# Altium PCB ltftemplate.PcbDoc
Units mm, origin at the board's own origin, x right, y up, seen from the top; angles counter-clockwise.
Board outline 67 x 53 mm, 2 copper layers (Top Layer, Bottom Layer); 33 components, 26 nets, 145 pads, 12 vias.
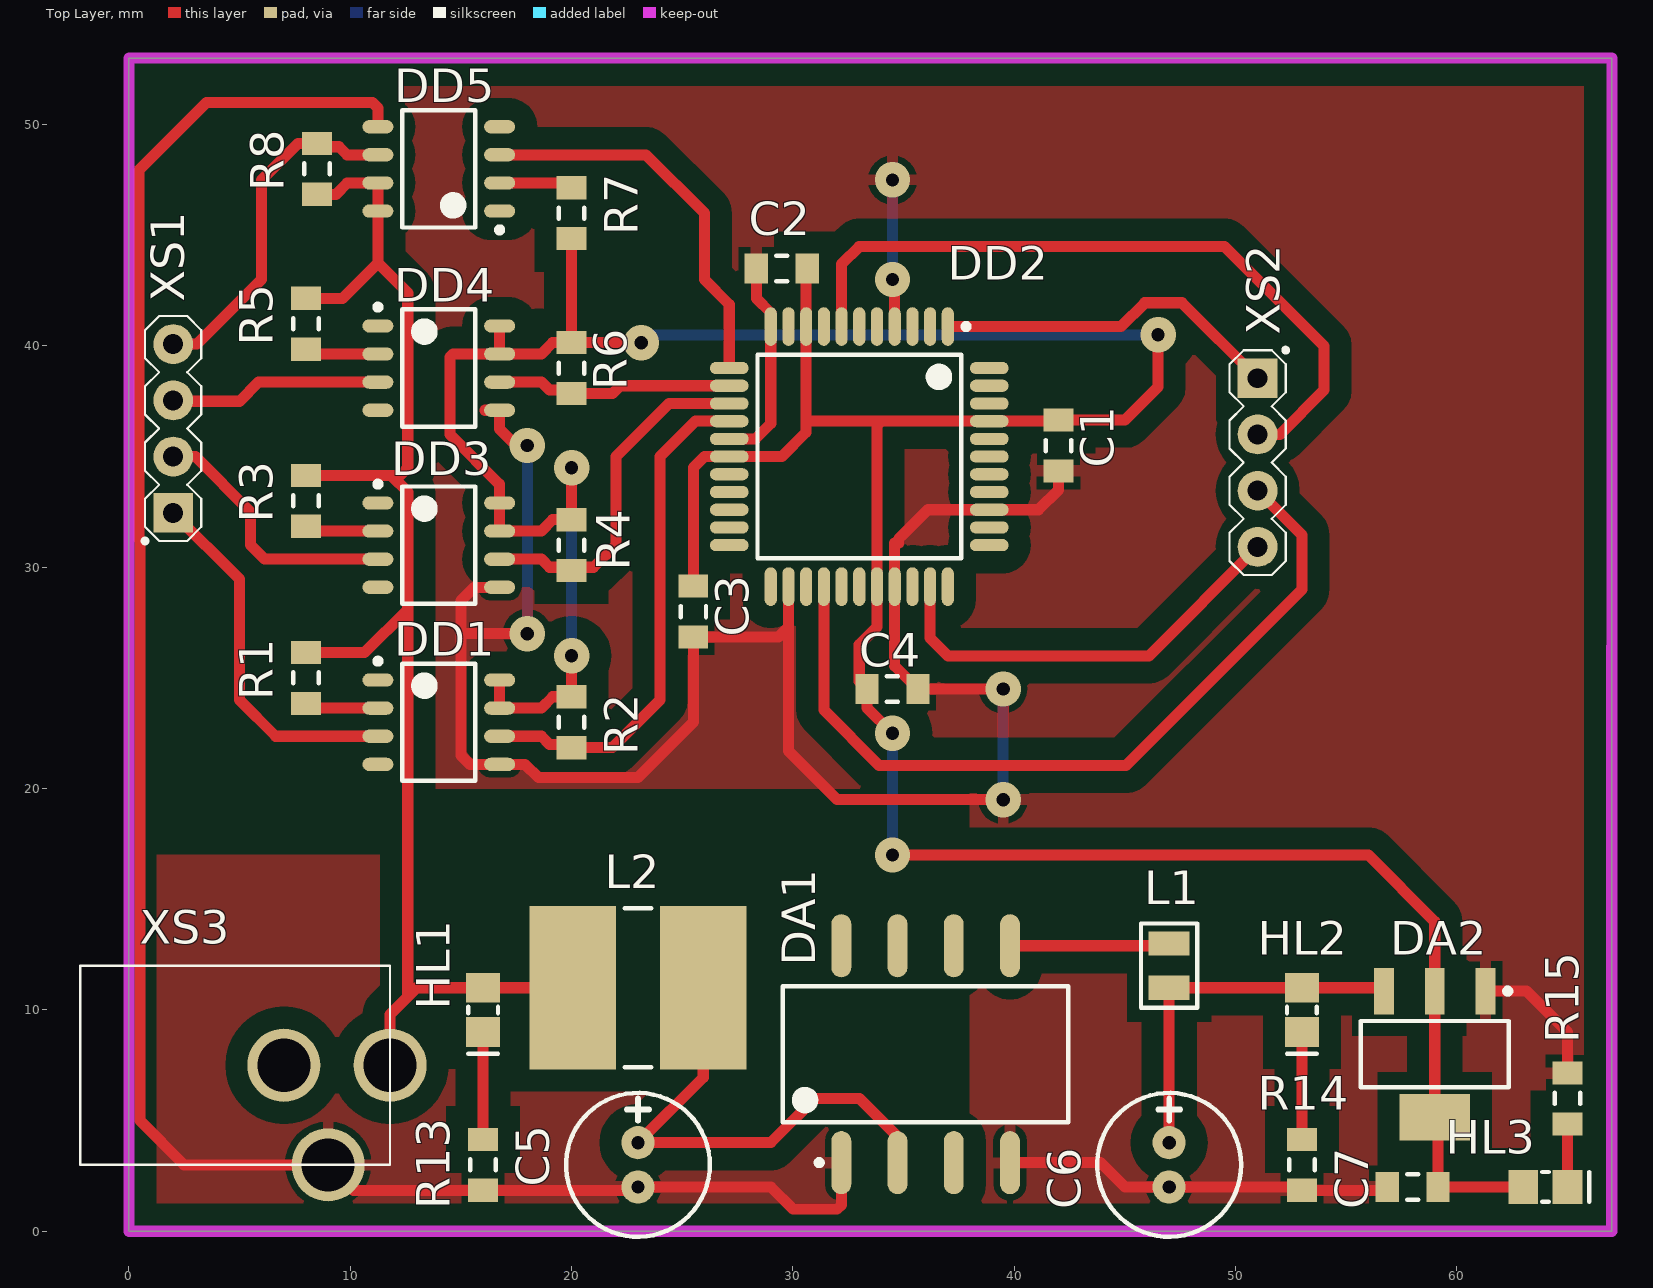
[diagram p0: Top Layer view]
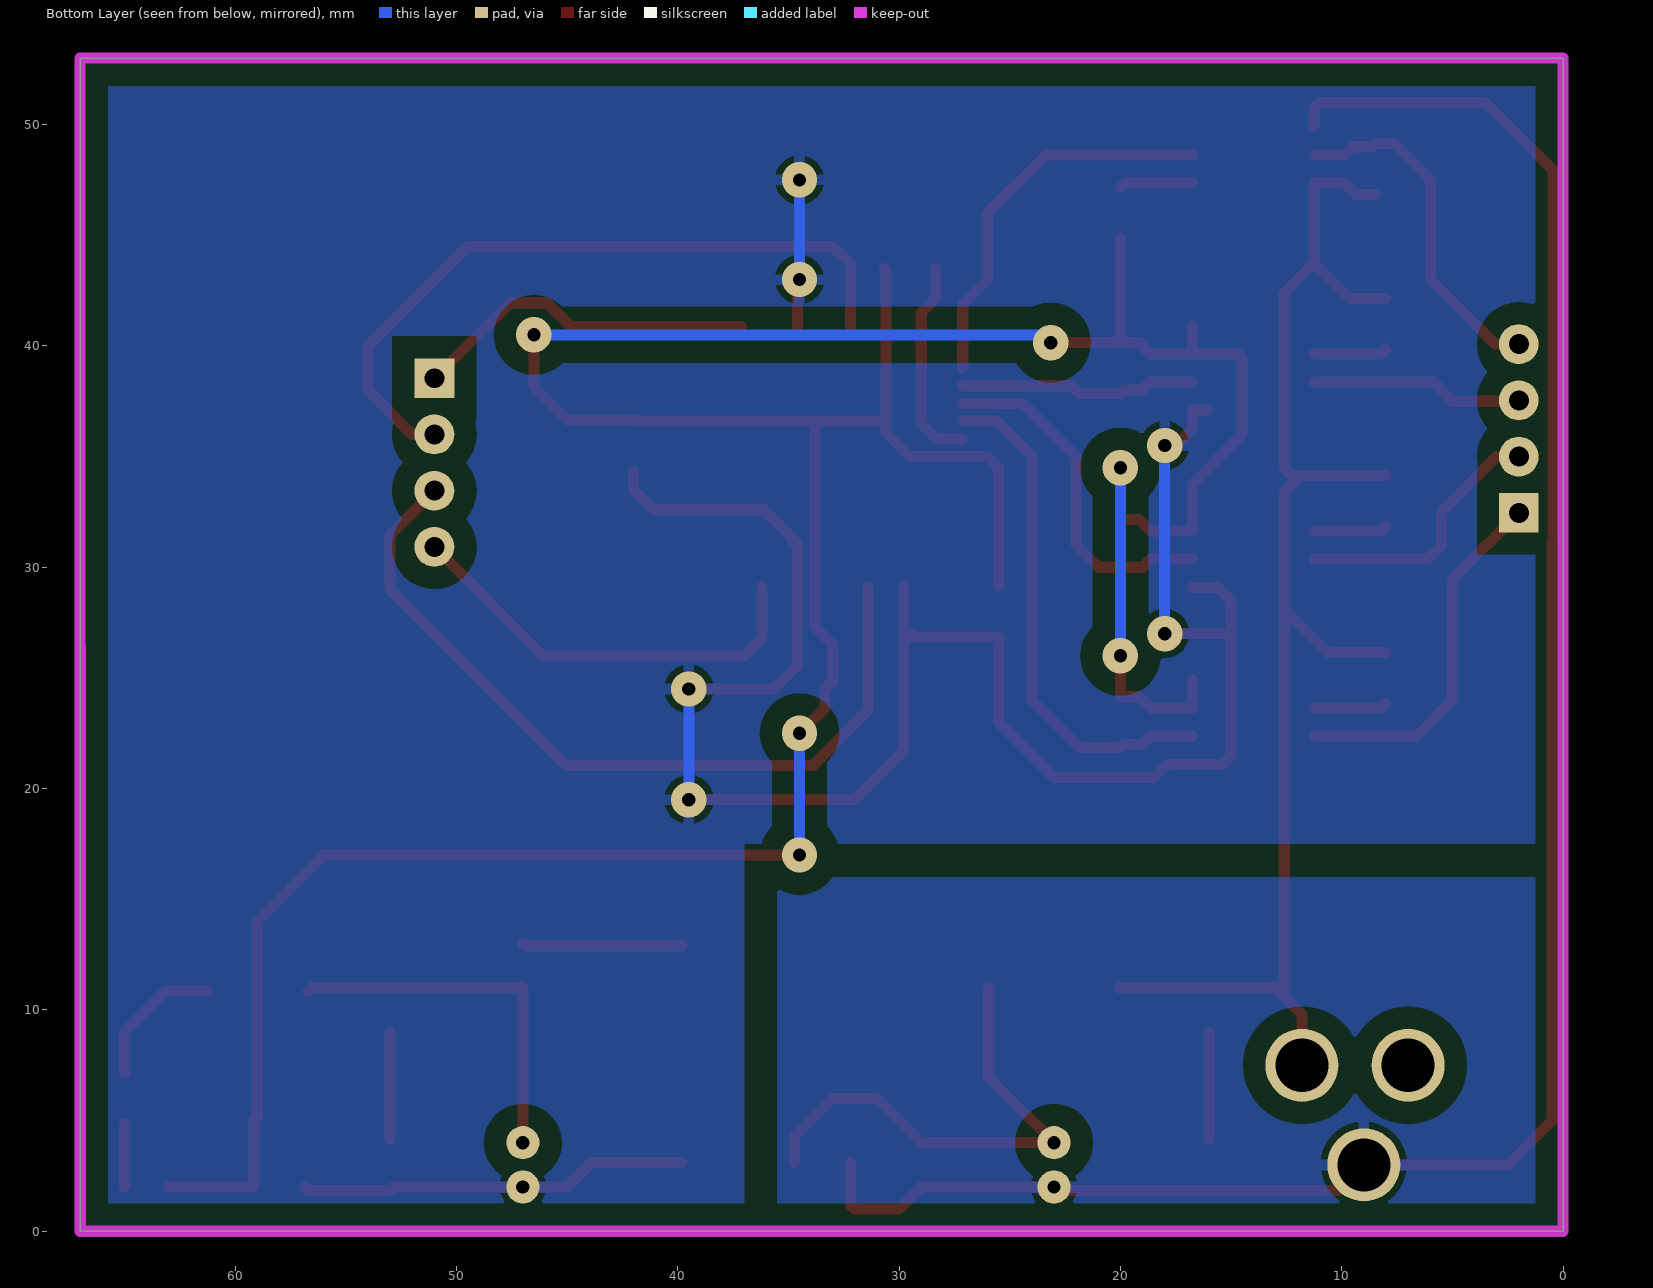
[diagram p1: Bottom Layer view, seen from below]

## Layer stack, top to bottom
Top Solder: solder mask 0.0102, Solder Resist, Dk 3.5
Top Layer: signal copper 0.0356
Dielectric 1: dielectric 0.32, FR-4, Dk 4.8
Bottom Layer: signal copper 0.0356
Bottom Solder: solder mask 0.0102, Solder Resist, Dk 3.5

## Board outline
0,0 67,0 67,53 0,53

## Design rules (kind name [scope] priority, off if disabled: settings)
AcuteAngle [All] p1: minimum=6.00000000000000E+0001 checktracksonly=FALSE
Clearance Clearance_cpld [IsRoom] p1: gap=0.2 ignorepadtopadclearanceinfootprint=TRUE
Clearance Clearance_poly [InPolygon] p2: gap=1 ignorepadtopadclearanceinfootprint=FALSE except(0: Arc-Hole Track-Hole SMDPad-Hole THPad-Hole Via-Hole Fill-Hole Poly-Hole Region-Hole Text-Hole)
Clearance Clearance_wire [IsWire vs IsWire] p3: gap=0.5 ignorepadtopadclearanceinfootprint=FALSE except(0: Arc-Hole Track-Hole SMDPad-Hole THPad-Hole Via-Hole Fill-Hole Poly-Hole Region-Hole Text-Hole)
Clearance [All] p4: gap=0.4 ignorepadtopadclearanceinfootprint=FALSE except(0: Arc-Hole Track-Hole SMDPad-Hole THPad-Hole Via-Hole Fill-Hole Poly-Hole Region-Hole Text-Hole)
ComponentClearance [All] p1: gap=0.1 collisioncheckmode=3 verticalgap=0.1 showdistances=FALSE
HoleSize [All] p1: absolutevalues=TRUE maxlimit=2.5 minlimit=0.3 maxpercent=80.000 minpercent=20.000
MaximumViaCount [All] p1: limit=20
MinimumAnnularRing [All] p1: minimumring=0.4
MinimumSolderMaskSliver [All] p1 off: minsoldermaskwidth=0.254
PasteMaskExpansion [All] p1: expansion=0.05
PlaneClearance [All] p1: clearance=0.5
PlaneConnect [All] p1: planeconnectstyle=Relief reliefexpansion=0.3 reliefentries=4 reliefconductorwidth=0.5 reliefairgap=0.3
PolygonConnect [All] p1: connectstyle=Relief reliefconductorwidth=0.5 reliefentries=4 polygonreliefangle="90 Angle" airgapwidth=0.3
RoomDefinition main [InComponentClass('main')] p1: confinementstyle=ConfineIn formatcopy=TRUE lockcomponents=FALSE outline 0,0 67,0 67,53 0,53
RoomDefinition CPLD [InComponentClass('Components Class 1')] p2: confinementstyle=ConfineIn formatcopy=TRUE lockcomponents=FALSE outline 25,42.5 40.5,42.5 40.5,27 25,27
RoutingVias [All] p1: holewidth=0.6 width=1.6 viastyle="Through Hole" minholewidth=0.6 minwidth=1.6 maxholewidth=0.6 maxwidth=1.6
SilkToBoardRegionClearance [All] p1 off:
SilkToSilkClearance [All] p1 off: silktosilkclearance=0.254
SilkToSolderMaskClearance [IsPad] p1 off: minsilkscreentomaskgap=0.254 clearancetoexposedcopper=TRUE
SolderMaskExpansion [All] p1: expansion=0.1
ViasUnderSMD [All] p1: allowed=TRUE
Width [All] p1: maxlimit=1.5 minlimit=0.4 preferedwidth=0.5
21 further rules are at their usual default settings.

## Classes and differential pairs
component class "Components Class 1": DD2

## Components (designator, comment, footprint, x,y, rotation, side; value= is the part's Value field where it differs from the comment)
C1 "100n" SMDRC0805 42,35.5 r90 top
C2 "100n" SMDRC0805 29.5,43.5 r0 top
C3 "100n" SMDRC0805 25.5,28 r90 top
C4 "100n" SMDRC0805 34.5,24.5 r0 top
C5 "5 мк 6,3 В" К50-6 23,3 r90 top
C6 "10 мк 6,3 В" К50-6 47,3 r90 top
C7 "100n" SMDRC0805 58,2 r0 top
DA1 "AM1L-1205S-NZ" SOP254P1120X625-8M 36,8 r90 top
DA2 "LD1117A" SOT230P700X180-4L 59,8 r270 top
DD1 "HCPL-0601" HCPL-1601 14,23 r0 top
DD2 "EPM3064ATC44-10N" TQFP80P1200X1230X120-44N 33,35 r270 top
DD3 "HCPL-0601" HCPL-1601 14,31 r0 top
DD4 "HCPL-0601" HCPL-1601 14,39 r0 top
DD5 "HCPL-0601" HCPL-1601 14,48 r180 top
HL1 "KP-2012SGC" DIOMELF2012M 16,10 r270 top
HL2 "KP-2012SGC" DIOMELF2012M 53,10 r270 top
HL3 "KP-2012SGC" DIOMELF2012M 64,2 r0 top
L1 "10 мкГн" MLZ2012 47,12 r270 top
L2 "330 мкГн" INDP7972X50M 23,11 r180 top
R1 "220.0" SMDRC0805 8,25 r90 top
R2 "1k" SMDRC0805 20,23 r90 top
R3 "220.0" SMDRC0805 8,33 r90 top
R4 "1k" SMDRC0805 20,31 r90 top
R5 "220.0" SMDRC0805 8,41 r90 top
R6 "1k" SMDRC0805 20,39 r90 top
R7 "100.0" SMDRC0805 20,46 r270 top
R8 "1k" SMDRC0805 8.5,48 r270 top
R13 "220.0" SMDRC0805 16,3 r90 top
R14 "220.0" SMDRC0805 53,3 r270 top
R15 "100.0" SMDRC0805 65,6 r270 top
XS1 "PLS-4" PLS-04 2,32.46 r90 top
XS2 "PLS-4" PLS-04 51,38.54 r270 top
XS3 "гнездо 5.5*2.1 (3015) 2826" CON2_3015_PowerJack_5.5x2.1 -2.2,12 r270 top

## Footprints (in the part's own frame and the unit in brackets; to place one, negate y for a bottom-side part, rotate by r counter-clockwise, add the part's x,y. Pads: shape width x height; smd on the part's side, far side on the other; paste and mask are expansions set on the pad)
CON2_3015_PowerJack_5.5x2.1 [mm] "Power_Con"
  round 3.3 hole 2.4: 1(4.5,14) 2(9,11.2) 3(4.5,9.2)
  silkscreen extent 0,0 9,14, body extent -0.5,-0.1 9.48,14, height 10.96
DIOMELF2012M [mm] "MELF Diode, 2-Leads, Body 2,00x1,20mm, IPC Low Density"
  rect 1.35x1.55 smd: 1(-1,0) 2(1,0)
  silkscreen extent -0.15,-0.67 1.97,0.67, body extent -1,-0.6 1,0.6, height 1.2
HCPL-1601 [mm] "SOIC, 8-Leads, Body 5,21x3,94mm, Pitch 1,27mm, IPC Medium Density"
  oval 1.4x0.6 smd: 1(-2.75,1.905) 2(-2.75,0.635) 3(-2.75,-0.635) 4(-2.75,-1.905) 5(2.75,-1.905) 6(2.75,-0.635) 7(2.75,0.635) 8(2.75,1.905)
  silkscreen extent -2.87,-2.65 1.65,2.88, body extent -3,-2.65 3,2.65, height 3.3
INDP7972X50M [mm] "Precision Wire Wound Inductor, 2-Leads, Body 7,90x7,20mm, IPC Low Density"
  rect 3.9x7.4 smd: 1(-2.95,0) 2(2.95,0)
  silkscreen extent -0.6,-3.6 0.6,3.6, body extent -3.95,-3.6 3.95,3.6, height 5
MLZ2012 [mm]
  rect 1.1x1.85 smd: 1(-1,0) 2(1,0)
  silkscreen extent -1.91,-1.27 1.91,1.27, body extent -1,-0.6 1,0.6, height 1.3
PLS-04 [mm] "вилка на плату"
  rect 1.8x1.8 hole 0.9: 1(0,0)
  round 1.8 hole 0.9: 2(2.54,0) 3(5.08,0) 4(7.62,0)
  silkscreen extent -1.37,-1.27 8.89,1.37, body extent -1.27,-1.25 8.89,1.25, height 8.6
SMDRC0805 [mm] "Chip Resistor, 2-Leads, Body 2,00x1,20mm, IPC Low Density"
  rect 1.05x1.35 smd: 1(-1.15,0) 2(1.15,0)
  silkscreen extent -0.25,-0.58 0.25,0.58, body extent -1,-0.6 1,0.6, height 0.4
SOP254P1120X625-8M [mm] "SOP, 8-Leads, Body 12,70x7,25mm, Pitch 2,54mm, IPC Low Density"
  oval 2.85x0.9 smd: 1(-4.9,3.81) 2(-4.9,1.27) 3(-4.9,-1.27) 4(-4.9,-3.81) 5(4.9,-3.81) 6(4.9,-1.27) 7(4.9,1.27) 8(4.9,3.81)
  silkscreen extent -5.02,-6.45 3.08,6.45, body extent -3.75,-6.45 3.75,6.45, height 6.25
SOT230P700X180-4L [mm] "SOT223, 4-Leads, Body 6,50x7,00mm (avg), Pitch 2,30mm, IPC High Density"
  rect 2.1x0.9 smd: 1(-2.85,2.3) 2(-2.85,0) 3(-2.85,-2.3)
  rect 2.1x3.2 smd: 4(2.85,0)
  silkscreen extent -2.97,-3.35 1.5,3.43, body extent -1.85,-3.35 1.85,3.35, height 1.8
TQFP80P1200X1230X120-44N [mm] "TQFP, 44-Leads, Body 10,00x10,00mm, Pitch 0,80mm, IPC Medium Density"
  oval 1.75x0.55 smd: 1(-5.875,4) 2(-5.875,3.2) 3(-5.875,2.4) 4(-5.875,1.6) 5(-5.875,0.8) 6(-5.875,0) 7(-5.875,-0.8) 8(-5.875,-1.6) 9(-5.875,-2.4) 10(-5.875,-3.2) 11(-5.875,-4) 23(5.875,-4) 24(5.875,-3.2) 25(5.875,-2.4) 26(5.875,-1.6) 27(5.875,-0.8) 28(5.875,0) 29(5.875,0.8) 30(5.875,1.6) 31(5.875,2.4) 32(5.875,3.2) 33(5.875,4)
  oval 0.55x1.75 smd: 12(-4,-5.875) 13(-3.2,-5.875) 14(-2.4,-5.875) 15(-1.6,-5.875) 16(-0.8,-5.875) 17(0,-5.875) 18(0.8,-5.875) 19(1.6,-5.875) 20(2.4,-5.875) 21(3.2,-5.875) 22(4,-5.875) 34(4,5.875) 35(3.2,5.875) 36(2.4,5.875) 37(1.6,5.875) 38(0.8,5.875) 39(0,5.875) 40(-0.8,5.875) 41(-1.6,5.875) 42(-2.4,5.875) 43(-3.2,5.875) 44(-4,5.875)
  silkscreen extent -6,-4.6 4.6,4.95, body extent -6,-6.15 6,6.15, height 1.2
К50-6 [mm]
  round 1.5 hole 0.6: 1(-1,0) 2(1,0)
  silkscreen extent -3.25,-3.25 3.25,3.25, body extent -3.07,-2.99 3,2.99, height 15.1

## Part data
C1 C2 C3 C4 C7: library part "Capacitor 0805 100n", "Generic capasitor non-polar", Package=0805, ComponentLink1Description=Datasheet, PartNumber="Capacitor 0805 100n"
C5: library part 05000_006-К50, "5uF 6,3V Polar through-hole cap", ManufacturerPartNumber=К-50-6, Package=штырьевой, ComponentLink1Description=Datasheet, ComponentLink2Description=Datasheet-local, Price=-, Supplier=-
C6: library part 10000_006-К50, "10uF 6,3V Polar through-hole cap", ManufacturerPartNumber=К-50-6, Package=штырьевой, ComponentLink1Description=Datasheet, ComponentLink2Description=Datasheet-local, Price=-, Supplier=-
DA1: "DC/DC Isolation", Manufacturer=AIMTEC, Package=SMD-8, ComponentLink1Description=Datasheet, ComponentLink1URL=http://www.aimtec.com/site/Aimtec/files/Datasheet/HighResolution/AM1L-N-Z.pdf, ManufacturerPartNumber=AM1L-1205S-NZ, Price=166,68, Supplier=Диджитек
DA2: library part LD1117AS33TR, "LDO регулятор напряжения 3.3V 1.0A Positive", Manufacturer=STMicroelectronics, ComponentLink1Description=http://www.mouser.com/ds/2/389/CD00002116-250310.pdf, ComponentLink1URL=http://www.mouser.com/ds/2/389/CD00002116-250310.pdf, ManufacturerPartNumber=LD1117AS33TR, Price=45
DD1 DD3 DD4 DD5: library part HCPL-0601-500E, "OPTOISO 3.75KV OPN COLLECTOR 8SO", Case/Package=SOIC, Forward Current=50mA, Forward Voltage=1.75V, Input Current=15mA, Isolation Voltage=3.75kV, Manufacturer="Fairchild Semiconductor", Max Operating Temperature=85°C, Max Output Voltage=7V, Max Power Dissipation=85mW, Min Operating Temperature=-40°C, Package Quantity=3000, Reverse Breakdown Voltage=5V, Supplier Part Number 1=512-HCPL0601, ComponentLink1Description=https://datasheet.ciiva.com/4698/hcpl0601-185320-4698727.pdf, ComponentLink1URL=https://datasheet.ciiva.com/4698/hcpl0601-185320-4698727.pdf, ComponentLink2Description=https://datasheet.ciiva.com/11772/0900766b80d1f17b-11772100.pdf, ComponentLink2URL=https://datasheet.ciiva.com/11772/0900766b80d1f17b-11772100.pdf, ComponentLink3Description=https://datasheet.ciiva.com/26912/hcpl0601-26912362.pdf, ComponentLink3URL=https://datasheet.ciiva.com/26912/hcpl0601-26912362.pdf, ComponentLink4Description=https://datasheet.ciiva.com/2083/hcpl0611-2083487.pdf, ComponentLink4URL=https://datasheet.ciiva.com/2083/hcpl0611-2083487.pdf, ComponentLink5Description=https://datasheet.ciiva.com/26162/hcpl0611-26162959.pdf, ComponentLink5URL=https://datasheet.ciiva.com/26162/hcpl0611-26162959.pdf, ComponentLink6Description=https://datasheet.ciiva.com/26910/getdatasheetpartid-81668-26910220.pdf, ComponentLink6URL=https://datasheet.ciiva.com/26910/getdatasheetpartid-81668-26910220.pdf, ComponentLink7Description=https://datasheet.ciiva.com/8074/1796808-8074123.pdf, ComponentLink7URL=https://datasheet.ciiva.com/8074/1796808-8074123.pdf, ComponentLink8Description=https://datasheet.ciiva.com/8100/hcpl0611-8100123.pdf, ComponentLink8URL=https://datasheet.ciiva.com/8100/hcpl0611-8100123.pdf, Data Rate=10Mbps, Direction=Unidirectional, Fall Time=12ns, Height=3.43mm, Lead Free="Lead Free", Length=5.13mm, ManufacturerPartNumber=HCPL-0601, Max Input Current=15mA, Max Output Current=50mA, Mount="Surface Mount", Number of Channels=1, Number of Elements=1, Number of Pins=8, Output Current=50mA, Output Current per Channel=50mA, Output Voltage=7V, Packaging=Rail/Tube, Polarity=Inverting, Power Dissipation=85mW, Pricing 1="1=2.35, 10=2, 100=1.6, 500=1.4, 1000=1.16, 3000=1.07, 6000=1.03, 9000=0.958 (USD)", Propagation Delay=75ns, Radiation Hardening=No, REACH SVHC="No SVHC", Reverse Voltage (DC)=5V, Rise Time=50ns, Stock 1=5013, Supplier 1=Mouser, Turn-On Delay Time=75ns, Weight=0.252g, Width=4.16mm
DD2: library part EPM3064ATC44, "MAX 3000A, 64 MACROCELLS", Case/Package=TQFP, Frequency=125MHz, Manufacturer=Altera, Max Frequency=222.2MHz, Max Operating Temperature=70°C, Max Supply Voltage=3.6V, Min Operating Temperature=0°C, Min Supply Voltage=3V, Operating Supply Voltage=3.3V, Package Quantity=160, Supplier Part Number 1=544-1977-ND, ComponentLink1Description=https://datasheet.ciiva.com/1407/m3000a-1407040.pdf, ComponentLink1URL=https://datasheet.ciiva.com/1407/m3000a-1407040.pdf, ComponentLink2Description=https://datasheet.ciiva.com/1152/134639-1152985.pdf, ComponentLink2URL=https://datasheet.ciiva.com/1152/134639-1152985.pdf, ComponentLink3Description=https://datasheet.ciiva.com/25922/m3000a-25922153.pdf, ComponentLink3URL=https://datasheet.ciiva.com/25922/m3000a-25922153.pdf, ComponentLink4Description=https://datasheet.ciiva.com/5702/m3000a-5702171.pdf, ComponentLink4URL=https://datasheet.ciiva.com/5702/m3000a-5702171.pdf, ComponentLink5Description=https://datasheet.ciiva.com/1152/134639-1152983.pdf, ComponentLink5URL=https://datasheet.ciiva.com/1152/134639-1152983.pdf, ComponentLink6Description=https://datasheet.ciiva.com/1161/m3000a-1161336.pdf, ComponentLink6URL=https://datasheet.ciiva.com/1161/m3000a-1161336.pdf, ComponentLink7Description=https://datasheet.ciiva.com/5702/m3000a-5702168.pdf, ComponentLink7URL=https://datasheet.ciiva.com/5702/m3000a-5702168.pdf, Height=0.95mm, Lead Free="Lead Free", Length=10mm, ManufacturerPartNumber=EPM3064ATC44-10N, Memory Type=EEPROM, Mount="Surface Mount", Number of Gates=1250, Number of I/Os=34, Number of Inputs=34, Number of Logic Blocks (LABs)=4, Number of Logic Elements/Cells=4, Number of Macrocells=64, Number of Pins=44, Number of Programmable I/O=34, Packaging=Tray, Pricing 1="1=2.93 (USD)", Propagation Delay=10ns, Radiation Hardening=No, REACH SVHC=Unknown, Speed Grade=10, Stock 1=1163, Supplier 1=Digi-Key, Termination=SMD/SMT, Turn-On Delay Time=10ns, Width=10mm
HL1 HL2 HL3: library part LED1_G, "Diod LED SMD Green", Color=Green, ComponentLink1Description=Datasheet, ComponentLink2Description=Datasheet-local, ManufacturerPartNumber=KP-2012SGC, Price=2,88
L1: library part MLZ2012N100LT, "Катушка 500mA 10мкГн", Manufacturer=TDK, ManufacturerPartNumber=MPZ1608S181A, Package=2012, ComponentLink1Description=Datasheet, ComponentLink1URL=http://www.mouser.com/ds/2/400/inductor_commercial_decoupling_mlz_en-348849.pdf, ComponentLink2Description=Datasheet-local, Supplier=Промэлектроника
L2: library part SCD0705T-331K-N, "Inductor", ComponentLink1Description=Datasheet, ComponentLink1URL=http://download.siliconexpert.com/pdfs/2010/12/8/6/47/4/732/yageo_/manual/inductors_smdpower_scd_2010.pdf, ComponentLink2Description=Datasheet-local, ManufacturerPartNumber=SCD0705T-331K-N
R1 R3 R5 R13 R14: library part "Resistor 0805 220", "Generic resistor", Package=0805, ComponentLink1Description=Datasheet, ComponentLink1URL=http://www.mouser.com/ds/2/447/PYu-RC0402_51_RoHS_L_6_r-8721.pdf, PartNumber="Resistor 0805 220"
R2 R4 R6 R8: library part "Resistor 0805 1k", "Generic resistor", Package=0805, ComponentLink1Description=Datasheet, ComponentLink1URL=http://www.mouser.com/ds/2/447/PYu-RC0402_51_RoHS_L_6_r-8721.pdf, PartNumber="Resistor 0805 1k"
R7 R15: library part "Resistor 0805 100", "Generic resistor", Package=0805, ComponentLink1Description=Datasheet, ComponentLink1URL=http://www.mouser.com/ds/2/447/PYu-RC0402_51_RoHS_L_6_r-8721.pdf, PartNumber="Resistor 0805 100"
XS1 XS2: library part Con4_M_PLS-4, "Male 4-pin connection", ComponentLink1Description=Datasheet, ComponentLink1URL=http://www.promelec.ru/catalog/406/1218/1224/1/24233/, ComponentLink2Description=Datasheet-local, ManufacturerPartNumber=PLS-4, Price=1
XS3: library part Con2_F_PowerJack_3015, "гнездо 5.5*2.1", Manufacturer=Unknown, ManufacturerPartNumber="гнездо 5.5*2.1 (3015) 2826", Price=16.77, Supplier=Промэлектроника

## Via types
v1: diameter 1.6, hole 0.6, Top Layer to Bottom Layer, 12 vias

## Nets (pads, with @x,y where several pads share a name; then routed paths per layer and width w, separated by ;. In a path a pad name is that pad's centre, name@x,y a point inside that pad or via, vN(x,y) a via of type N, cw(c..) or ccw(c..) an arc to the next point about the centre after c; other vN are vias at no path point)
+3V_INT: C1.2 C2.2 C3.2 C4.1 C7.2 DA2.2 DA2.4 DD1.7 DD1.8 DD2.9 DD2.17 DD2.29 DD2.41 DD3.7 DD3.8 DD4.7 DD4.8 HL3.1 R2.2 R4.2 R6.2 R7.2 | length 167.8
  Top Layer w0.5: DD1.8 DD1.7 18.635,23.635 19.15,24.15 R2.2 v1(20,26) ; DD4.8 DD4.7 ; v1(20,34.5) R4.2 19.15,32.15 18.635,31.635 DD3.7 DD3.8 16.75,33.75 14.5,36 14.5,39.5 14.635,39.635 DD4.7 ; R7.2 R6.2 ; v1(23.15,40.15) R6.2 ; C3.2 25.5,34.5 26,35 DD2.17 29.5,35 30.6,36.1 30.6,36.6 ; C2.2 30.6,43.45 DD2.9 30.6,36.6 ; v1(34.5,17) 56,17 59,14 DA2.2 DA2.4 59.15,5 C7.2 HL3.1 ; v1(34.5,22.5) 33.35,23.65 C4.1 33,24.85 33,26.5 33.8,27.3 DD2.29 33.8,36.4 34,36.6 ; v1(46.5,40.5) 46.5,38.15 45,36.65 C1.2 41.95,36.6 DD2.41 34,36.6 ; DD4.7 18.635,39.635 19.15,40.15 R6.2 ; 30.6,36.6 34,36.6
  Bottom Layer w0.5: v1(20,26) v1(20,34.5) ; v1(23.15,40.15) 23.5,40.5 v1(46.5,40.5) ; v1(34.5,17) v1(34.5,22.5)
+5V_EXT: DD5.7 DD5.8 HL1.1 L2.2 R1.2 R3.2 R5.2 R8.2 XS3.1 | length 65.4
  Top Layer w0.5: R1.2 10.65,26.15 12.6,28.1 ; R3.2 11.85,34.15 ; R5.2 9.65,42.15 11.25,43.75 ; R8.2 9.35,46.85 9.865,47.365 DD5.7 DD5.8 11.25,43.75 ; XS3.1 11.8,9.8 12.6,10.6 ; L2.2 HL1.1 13,11 12.6,10.6 ; 11.25,43.75 12.6,42.4 12.6,34.5 12.25,34.15 11.85,34.15 ; 11.85,34.15 12.6,33.4 12.6,28.1 ; 12.6,10.6 12.6,28.1
+5V_INT: C6.2 DA2.3 HL2.1 L1.2 | length 16.8
  Top Layer w0.5: C6.2 L1.2 HL2.1 56.55,11 DA2.3
GND: C1.1 C2.1 C3.1 C4.2 C6.1 C7.1 DA1.4 DA2.1 DD1.5 DD2.4 DD2.11 DD2.16 DD2.24 DD2.30 DD2.36 DD3.5 DD4.5 R14.2 R15.1 | length 127.7
  Top Layer w0.5: DD4.5@16.095,37.095 DD4.5 16.75,36.25 17.5,35.5 v1(18,35.5) ; DD3.5 15.595,29.095 15,28.5 15,27 ; v1(18,27) 15,27 ; DD2.16 28.3,35.8 29,36.5 DD2.11 29,41.5 28.35,42.15 C2.1 ; 29.8,28.017 29.8,21.7 32,19.5 v1(39.5,19.5) ; DD2.24 29.8,27.3 29.35,26.85 C3.1 25.5,23 23,20.5 18.5,20.5 17.905,21.095 DD1.5 15.405,21.095 15,21.5 15,27 ; v1(34.5,43) 34.6,42.9 DD2.4 ; 34.6,31.1 DD2.30 34.6,25.55 C4.2 v1(39.5,24.5) ; 34.8,31.1 34.8,31.3 36.1,32.6 DD2.36 41.1,32.6 42,33.5 C1.1 ; DA1.4 43.9,3.1 45,2 C6.1 52.85,2 R14.2 56.7,1.85 C7.1 ; DA2.1 63.15,10.85 65,9 R15.1
  Bottom Layer w0.5: v1(18,27) v1(18,35.5) ; v1(34.5,43) v1(34.5,47.5) ; v1(39.5,19.5) v1(39.5,24.5)
GND_EXT: C5.1 DA1.1 DD5.5 R13.1 XS3.2 | length 91.4
  Top Layer w0.5: DD5.5 11.25,50.75 11,51 3.5,51 0.45,47.95 0.45,31.241 0.5,31.191 0.5,5 2.5,3 XS3.2 10.15,1.85 R13.1 22.85,1.85 C5.1 29,2 30,1 32,1 32.19,1.19 DA1.1
NetC5_2: C5.2 DA1.2 L2.1 | length 22.7
  Top Layer w0.5: L2.1 25.95,6.95 C5.2 29,4 31,6 33,6 34.73,4.27 DA1.2
NetDA1_5: DA1.5 L1.1 | length 7.2
  Top Layer w0.5: DA1.5 46.9,12.9 L1.1
NetDD1_2: DD1.2 R1.1 | length 3.3
  Top Layer w0.5: R1.1 8.215,23.635 DD1.2
NetDD2_1: DD2.1 XS2.1 | length 15.7
  Top Layer w0.5: DD2.1@37.125,40.875 44.824,40.875 45.899,41.95 47.59,41.95 XS2.1
NetDD2_7: DD2.7 XS2.2 | length 32.6
  Top Layer w0.5: DD2.7 32.2,43.7 33,44.5 49.5,44.5 54,40 54,38 52,36 XS2.2
NetDD2_26: DD2.26 XS2.3 | length 36.8
  Top Layer w0.5: DD2.26 31.4,23.549 33.899,21.05 45.05,21.05 53,29 53,31.46 XS2.3
NetDD2_32: DD2.32 XS2.4 | length 19.5
  Top Layer w0.5: DD2.32 36.2,26.8 37,26 46.08,26 XS2.4
NetDD3_2: DD3.2 R3.1 | length 3.3
  Top Layer w0.5: R3.1 8.215,31.635 DD3.2
NetDD4_2: DD4.2 R5.1 | length 3.3
  Top Layer w0.5: R5.1 8.215,39.635 DD4.2
NetDD5_2: DD5.2 R7.1 | length 3.3
  Top Layer w0.5: DD5.2 19.785,47.365 R7.1
NetHL1_2: HL1.2 R13.2 | length 4.9
  Top Layer w0.5: R13.2 HL1.2
NetHL2_2: HL2.2 R14.1 | length 4.9
  Top Layer w0.5: R14.1 HL2.2
NetHL3_2: HL3.2 R15.2 | length 2.9
  Top Layer w0.5: HL3.2 R15.2
out: DD5.6 R8.1 XS1.4 | length 15.9
  Top Layer w0.5: XS1.4 3.08,40.08 6,43 6,47.5 7.65,49.15 R8.1 8.65,49 9.5,49 9.865,48.635 DD5.6
out_cpld: DD2.12 DD5.3 | length 17.8
  Top Layer w0.5: DD5.3 23.365,48.635 26,46 26,43 27.125,41.875 DD2.12
qa: DD4.3 XS1.3 | length 9.6
  Top Layer w0.5: XS1.3 2.04,37.5 5,37.5 5.865,38.365 DD4.3
qa_cpld: DD2.13 DD4.6 R6.1 | length 10.7
  Top Layer w0.5: DD4.6 18.635,38.365 19,38 19.85,38 R6.1 21.85,37.85 22.2,38.2 DD2.13
qb: DD3.3 XS1.2 | length 12
  Top Layer w0.5: XS1.2 3,35 5.5,32.5 5.5,31 6.135,30.365 DD3.3
qb_cpld: DD2.14 DD3.6 R4.1 | length 15.9
  Top Layer w0.5: DD3.6 18.635,30.365 19,30 21,30 22,31 22,35 24.4,37.4 DD2.14
z: DD1.3 XS1.1 | length 16.6
  Top Layer w0.5: XS1.1 5,29.46 5,24 6.635,22.365 DD1.3
z_cpld: DD1.6 DD2.15 R2.1 | length 23.1
  Top Layer w0.5: DD1.6 18.635,22.365 19,22 19.85,22 R2.1 21.85,21.85 24,24 24,35 25.6,36.6 DD2.15
pads on no net: DA1.3 DA1.6 DA1.7 DA1.8 DD1.1 DD1.4 DD2.2 DD2.3 DD2.5 DD2.6 DD2.8 DD2.10 DD2.18 DD2.19 DD2.20 DD2.21 DD2.22 DD2.23 DD2.25 DD2.27 DD2.28 DD2.31 DD2.33 DD2.34 DD2.35 DD2.37 DD2.38 DD2.39 DD2.40 DD2.42 DD2.43 DD2.44 DD3.1 DD3.4 DD4.1 DD4.4 DD5.1 DD5.4 XS3.3

## Polygon pours and split planes (outlines as drawn)
GND on Top Layer "Top Layer-No Net" (solid, remove dead copper, pour order 2): 38,0 38,20 0,20 0,53 67,53 67,0
GND_EXT on Top Layer "Top Layer-No Net" (solid, remove dead copper, pour order 0): 0,0 0,16 1,17 36,17 36,0
GND on Bottom Layer "ext_g" (solid, remove dead copper, pour order 8): 37,0 37,17.5 0,17.5 0,53 67,53 67,0
GND_EXT on Bottom Layer "ext_g" (solid, remove dead copper, pour order 6): 0,0 35.5,0 35.5,16 0,16

## Keep-outs
Keep-Out Layer:
  the board outline again, w0.5